# Altium PCB LED-Driver.PcbDoc
Units mil, origin at the board's own origin, x right, y up, seen from the top; angles counter-clockwise.
Board outline 1200 x 1000 mil, 2 copper layers (Top Layer, Bottom Layer); 11 components, 7 nets, 23 pads, 54 vias.
Unrouted connection lines stored in the file: 3.
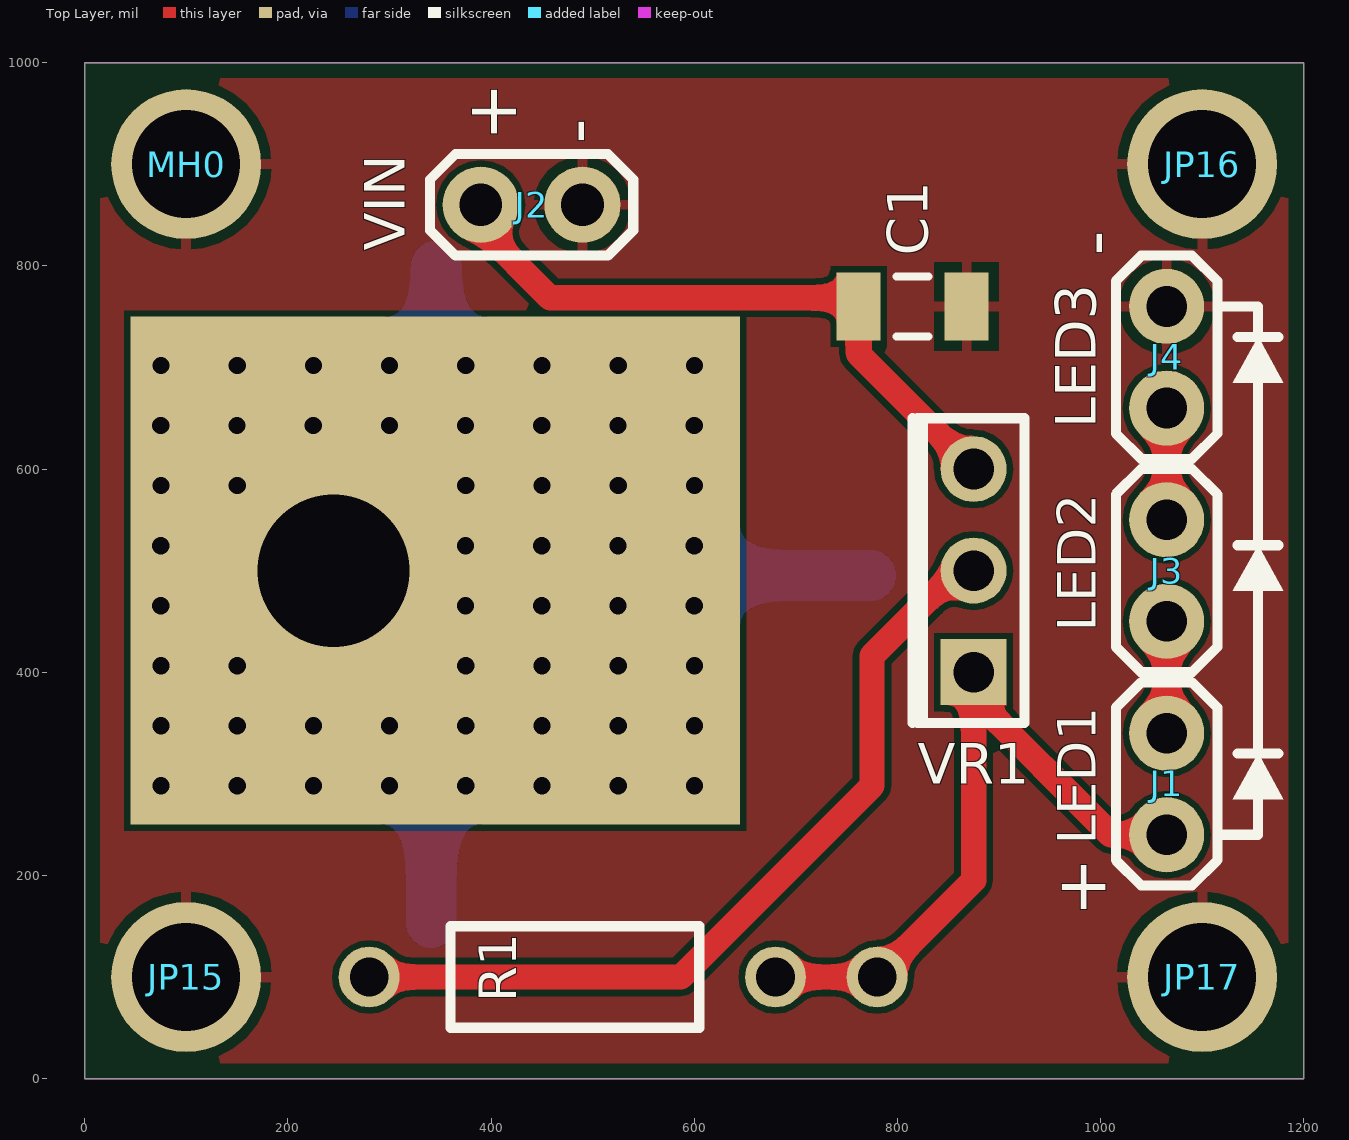
[diagram p0: Top Layer view]
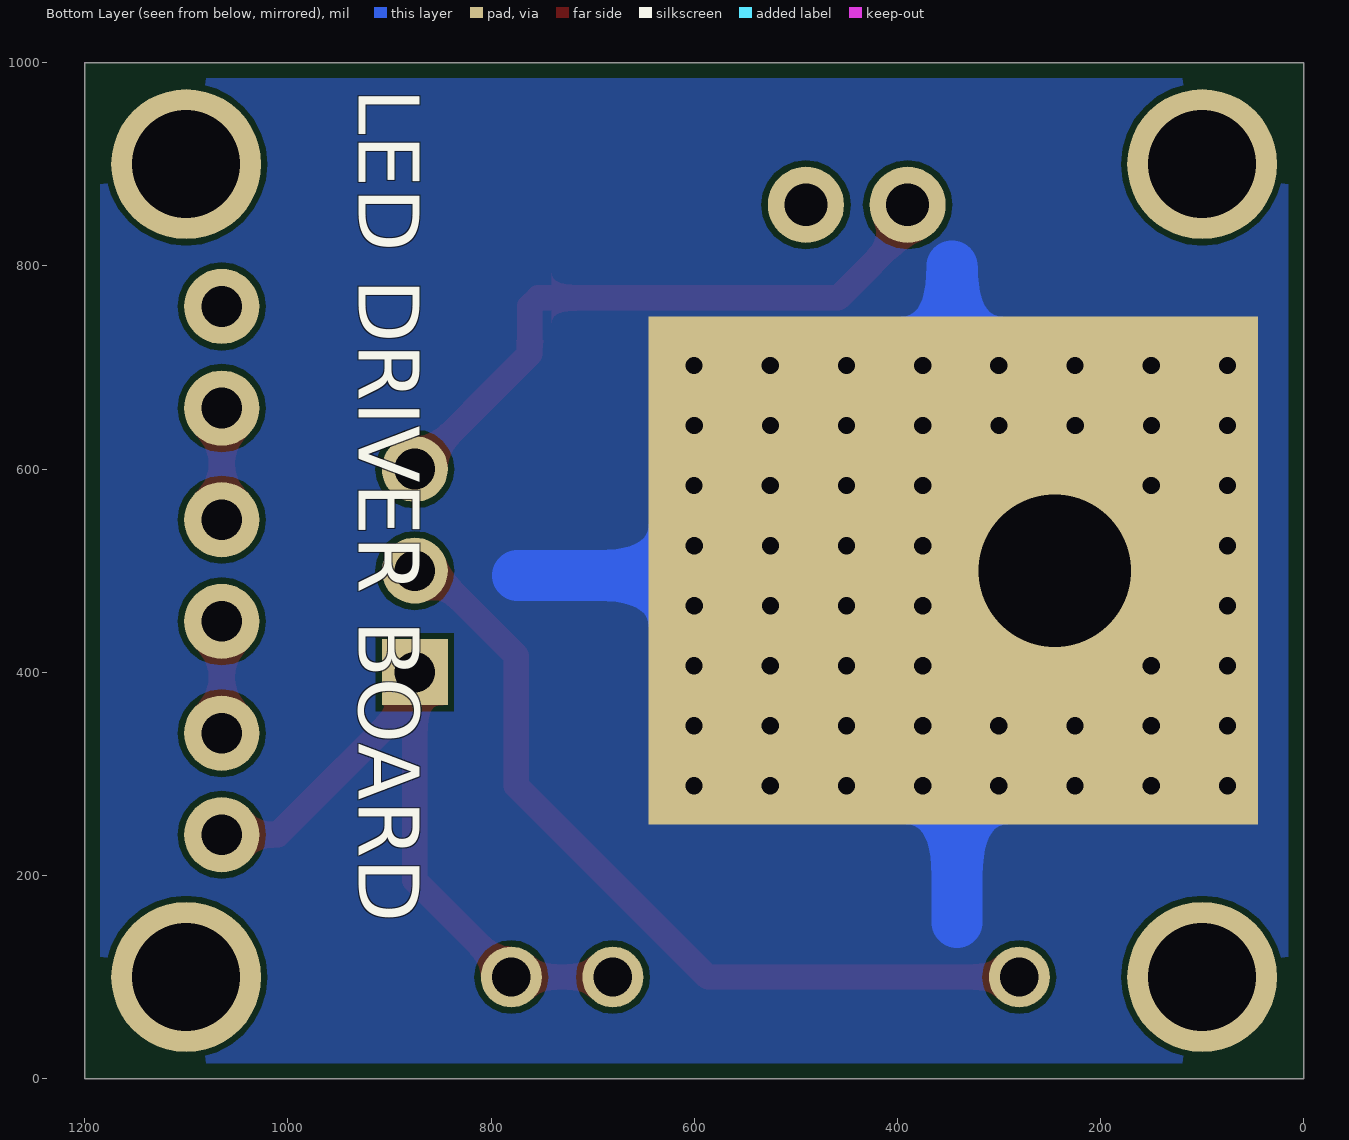
[diagram p1: Bottom Layer view, seen from below]

## Layer stack, top to bottom
Top Solder: solder mask 0.4, Solder Resist, Dk 3.5
Top Layer: signal copper 1.4
Dielectric 1: dielectric 12.6, FR-4, Dk 4.8
Bottom Layer: signal copper 1.4
Bottom Solder: solder mask 0.4, Solder Resist, Dk 3.5

## Board outline
0,0 1200,0 1200,1000 0,1000

## Design rules (kind name [scope] priority, off if disabled: settings)
BoardOutlineClearance [All] p1: gap=15 ignorepadtopadclearanceinfootprint=FALSE
Clearance [All] p1: gap=6 ignorepadtopadclearanceinfootprint=FALSE
ComponentClearance [All] p1 off: gap=10 collisioncheckmode=3 verticalgap=10 showdistances=FALSE
Height [All] p1 off: minheight=0 maxheight=1000 prefheight=500
HoleSize [All] p1: absolutevalues=TRUE maxlimit=150 minlimit=1 maxpercent=80.000 minpercent=20.000
MinimumAnnularRing [All] p1: minimumring=5
MinimumSolderMaskSliver [All] p1 off: minsoldermaskwidth=10
PlaneClearance [InNet('DummyNet')] p1: clearance=20
PlaneConnect [All] p1: planeconnectstyle=Direct reliefexpansion=20 reliefentries=4 reliefconductorwidth=10 reliefairgap=10
PolygonConnect ThermalConnect [InNet('DummyNet')] p1: connectstyle=Direct reliefconductorwidth=12 reliefentries=4 polygonreliefangle="90 Angle" airgapwidth=10
PolygonConnect [All] p2: connectstyle=Relief reliefconductorwidth=10 reliefentries=4 polygonreliefangle="90 Angle" airgapwidth=10
RoutingVias [All] p1: holewidth=27 width=20 viastyle="Through Hole" minholewidth=17 minwidth=17 maxholewidth=40 maxwidth=50
SilkToSilkClearance [All] p1 off: silktosilkclearance=10
SilkToSolderMaskClearance [IsPad] p1 off: minsilkscreentomaskgap=10 clearancetoexposedcopper=TRUE
SolderMaskExpansion [All] p1: expansion=4
Width [All] p1: maxlimit=150 minlimit=6 preferedwidth=10
22 further rules are at their usual default settings.

## Classes and differential pairs
component class LED-Driver: C1 J1 J2 J3 J4 R1 VR1

## Components (designator, comment, footprint, x,y, rotation, side; value= is the part's Value field where it differs from the comment)
C1 "Cap Semi" C1206 815,760 r180 top value=0.1uF
J1 "LED1" JMP2#1 1065,240 r90 top
J2 "VIN" JMP2#2 390,860 r0 top
J3 "LED2" JMP2#1 1065,450 r90 top
J4 "LED3" JMP2#1 1065,660 r90 top
JP15 "PWR SWITCH" Mounting-Hole-COMExpress#1 100,100 r90 top
JP16 "PWR SWITCH" Mounting-Hole-COMExpress#2 1250,900 r90 top
JP17 "PWR SWITCH" Mounting-Hole-COMExpress#3 1125,100 r90 top
MH0 "MH" Mounting-Hole-COMExpress#1 100,900 r90 top
R1 "1W" RES500 280,100 r0 top value=20R
VR1 "LM317" TO-220_HeatSinked 875,400 r0 top

## Footprints (in the part's own frame and the unit in brackets; to place one, negate y for a bottom-side part, rotate by r counter-clockwise, add the part's x,y. Pads: shape width x height; smd on the part's side, far side on the other; paste and mask are expansions set on the pad)
C1206 [mm] "Chip Capacitor, Body 3.2x1.6mm, IPC High Density"
  rect 1.1x1.7 smd: 1(-1.35,0) 2(1.35,0)
  silkscreen extent -0.4,-0.75 0.4,0.75, body extent -1.7,-0.9 1.7,0.9, height 1.3
JMP2#1 [mil]
  round 74 hole 40: 1(0,0) 2(100,0)
  silkscreen extent -50,-50 150,50
JMP2#2 [mil]
  round 75 hole 42: 1(0,0) 2(100,0)
  silkscreen extent -50,-50 150,50
Mounting-Hole-COMExpress#1 [mm] "Mounting Hole, COM Express, 6mm pad, 2.7mm hole"
  round 3.75 hole 2.7: 1(0,0)
Mounting-Hole-COMExpress#2 [mm] "Mounting Hole, COM Express, 6mm pad, 2.7mm hole"
  round 3.75 hole 2.7: 1(0,3.81)
Mounting-Hole-COMExpress#3 [mm] "Mounting Hole, COM Express, 6mm pad, 2.7mm hole"
  round 3.75 hole 2.7: 1(0,0.635)
RES500 [mil]
  round 60 hole 38: 1(0,0) 2(400,0)
  silkscreen extent 80,-50 325,50
TO-220_HeatSinked [mil]
  round 150 hole 150 paste+0 mask+0: 0(-630,100)
  rect 600x500 smd: 0(-530,100)
  rect 600x500 smd far side: 0(-530,100)
  rect 65x65 hole 40: 1(0,0)
  round 65 hole 40: 2(0,100) 3(0,200)
  silkscreen extent -60,-50 50,250, body extent -757,-98 10,302, height 165

## Part data
C1: "Capacitor (Semiconductor SIM Model)", LatestRevisionDate=29-May-2009, LatestRevisionNote="IPC-7351 Footprint Added.", PackageDescription="Chip Capacitor", PackageReference=C1206, Published=8-Jun-2000, Publisher="Altium Limited"
J1 J2 J3 J4: library part JUMPER_2, "JUMPER_2"
R1: library part Res1, "Resistor", LatestRevisionDate=17-Jul-2002, LatestRevisionNote="Re-released for DXP Platform.", PackageDescription="Axial Device, Thru-Hole; 2 Leads; 0.3 in Pin Spacing", PackageReference=AXIAL-0.3, Published=8-Jun-2000, Publisher="Altium Limited"
VR1: "3-Terminal Adjustable Regulator, 3-pin TO-220, Pb-Free", Manufacturer="National Semiconductor", PackageTopMarking="NSUZXYTTE#*LM317AT P+", PowerWise=N, ComponentLink1Description="LM317 Datasheet", ComponentLink1URL=http://www.national.com/ds/LM/LM317.pdf, ComponentLink2Description="LM317 Web Page", ComponentLink2URL=http://www.national.com/pf/LM/LM317.html, ComponentLink3Description="T03B Package Page", ComponentLink3URL=http://www.national.com/packaging/folders/t03b.html, CompType="LDO IC", DatasheetVersion=Apr-2007, PackageDescription="TO-220, Molded, 3 Lead, Straight", PackageReference=T03B, PackageVersion="revL, Jan-1992", PinCount=3, RevisionNote="Component URLs added", RoHS=Y

## Free pads (board coordinates)
  round 60 hole 38: 2(780,100)

## Via types
v1: diameter 30, hole 17, Top Layer to Bottom Layer, tented both sides, 54 vias

## Nets (pads, with @x,y where several pads share a name; then routed paths per layer and width w, separated by ;. In a path a pad name is that pad's centre, name@x,y a point inside that pad or via, vN(x,y) a via of type N, cw(c..) or ccw(c..) an arc to the next point about the centre after c; other vN are vias at no path point)
DummyNet: VR1.0 | length 933.1
  Bottom Layer w50: 341.25,153.61 VR1.0@341.25,342.44 ; 346.12,800 346.12,611.18 345,610.05 345,500 VR1.0@600,500 ; VR1.0@585,495.12 773.82,495.12
  other v1: 75.19,288.15 150.19,288.15 225.19,288.15 300.19,288.15 375.19,288.15 450.19,288.15 525.19,288.15 600.19,288.15 75.19,347.26 150.19,347.26 225.19,347.26 300.19,347.26 375.19,347.26 450.19,347.26 525.19,347.26 600.19,347.26 75.19,406.36 150.19,406.36 375.19,406.36 450.19,406.36 525.19,406.36 600.19,406.36 75,465.47 375,465.47 450,465.47 525,465.47 600,465.47 75,524.57 375,524.57 450,524.57 525,524.57 600,524.57 75.19,583.68 150.19,583.68 375.19,583.68 450.19,583.68 525.19,583.68 600.19,583.68 75,642.79 150,642.79 225,642.79 300,642.79 375,642.79 450,642.79 525,642.79 600,642.79 75.19,701.89 150.19,701.89 225.19,701.89 300.19,701.89 375.19,701.89 450.19,701.89 525.19,701.89 600.19,701.89
GND: C1.1 J2.2 J4.2 JP15.1 JP16.1 JP17.1 MH0.1
NetJ1_2: J1.2 J3.1 | length 110
  Top Layer w25: J1.2 J3.1
NetJ3_2: J3.2 J4.1 | length 110
  Top Layer w25: J3.2 J4.1
VADJ: J1.1 pad.2 R1.2 VR1.1 | length 710.3
  Top Layer w20: VR1.1@875,375 VR1.1
  Top Layer w25: R1.2 pad.2 875,195 VR1.1 ; VR1.1@875,375 1010,240 J1.1
VIN: C1.2 J2.1 VR1.3 | length 633.8
  Top Layer w25: J2.1 390,836.75 458.25,768.5 753.35,768.5 C1.2 761.85,713.15 VR1.3
VOUT: R1.1 VR1.2 | length 835.7
  Top Layer w25: R1.1 586.85,100 775,288.15 775,416.17 858.83,500 VR1.2

## Polygon pours and split planes (outlines as drawn)
GND on Top Layer "GND_L01_P002" (solid, remove dead copper, pour order 2): 0,0 1200,0 1200,1000 0,1000
DummyNet on Bottom Layer "DUMMYNET_L02_P004" (solid, remove dead copper, pour order 4): 0,0 1200,0 1200,1000 0,1000

## Keep-outs
Keep-Out Layer:
  the board outline again, w1

## Silkscreen, mask and mechanical layers (free items; w line width, h text height)
Top Overlay:
  region: 1130,685 1180,685 1155,730
  region: 1130,480 1180,480 1155,525
  region: 1130,275 1180,275 1155,320
  lines w10: 1115,760 1155,760 1155,730 ; 1120,240 1155,240 1155,275 ; 1135,320 1175,320 ; 1135,525 1175,525 ; 1135,730 1175,730 ; 1155,320 1155,480 ; 1155,525 1155,685
  text "+" at 425,980 h50 r90
  text "-" at 470,920 h50 r270
  text "-" at 980,810 h50 r270
  text "+" at 955,210 h50 r180
Bottom Overlay:
  text "LED DRIVER BOARD" at 930,975 h60 r90